# Altium PCB PCB_volume-adjuster.pcbdoc
Units mil, origin at the board's own origin, x right, y up, seen from the top; angles counter-clockwise.
Board outline 2755.91 x 1968.5 mil, 2 copper layers (Top Layer, Bottom Layer); 60 components, 49 nets, 243 pads, 0 vias.
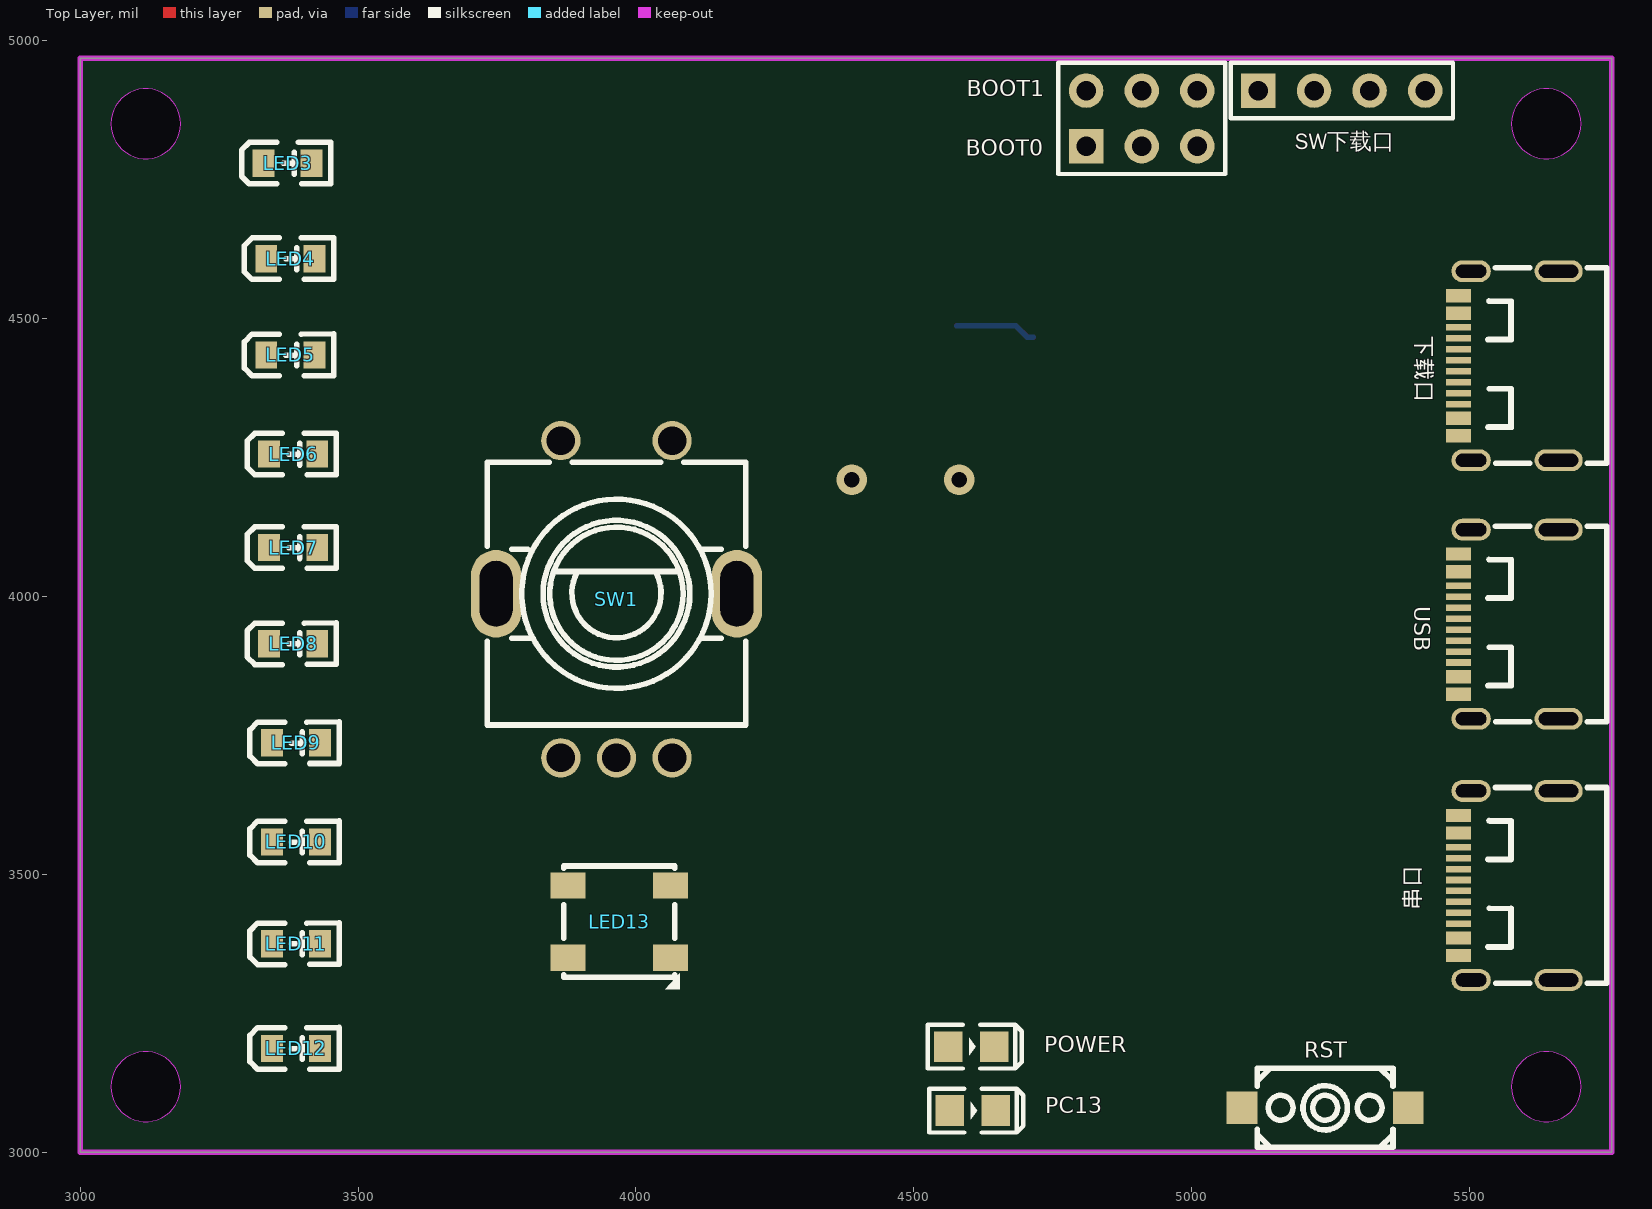
[diagram p0: Top Layer view]
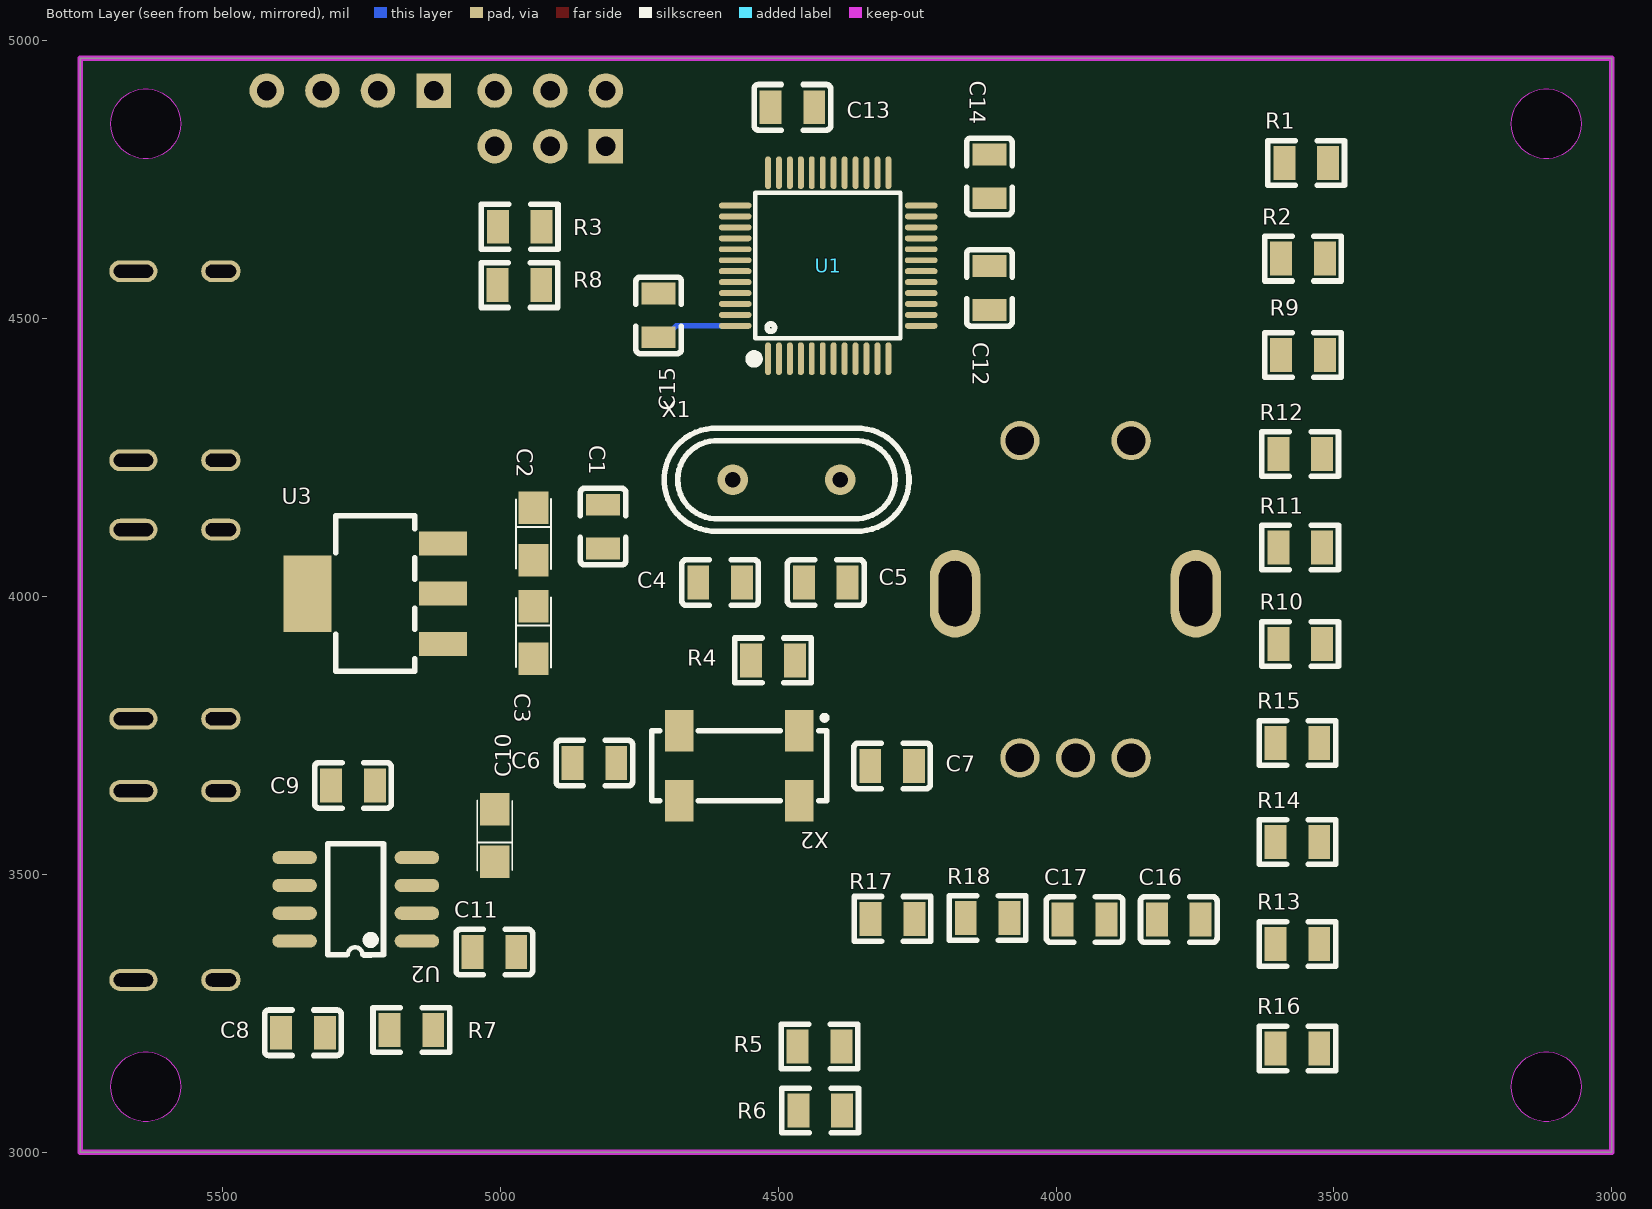
[diagram p1: Bottom Layer view, seen from below]

## Layer stack, top to bottom
Top Solder Mask Layer: solder mask 0.4, Solder Resist, Dk 3.5
Top Layer: signal copper 1.4
Dielectric1: dielectric 12.6, FR-4, Dk 4.8
Bottom Layer: signal copper 1.4
Bottom Solder Mask Layer: solder mask 0.4, Solder Resist, Dk 3.5

## Board outline
5755.91,3000 3000,3000 3000,4968.5 5755.91,4968.5
cut-out: 3181.1,4850.39 ccw(c3118.11,4850.39) 3055.12,4850.39 ccw(c3118.11,4850.39) 3181.1,4850.39
cut-out: 3181.1,3118.11 ccw(c3118.11,3118.11) 3055.12,3118.11 ccw(c3118.11,3118.11) 3181.1,3118.11
cut-out: 5700.79,3118.11 ccw(c5637.8,3118.11) 5574.8,3118.11 ccw(c5637.8,3118.11) 5700.79,3118.11
cut-out: 5700.79,4850.39 ccw(c5637.8,4850.39) 5574.8,4850.39 ccw(c5637.8,4850.39) 5700.79,4850.39

## Design rules (kind name [scope] priority, off if disabled: settings)
Clearance [All] p1: gap=10 ignorepadtopadclearanceinfootprint=TRUE except(0: Arc-Hole Track-Hole SMDPad-Hole THPad-Hole Via-Hole Fill-Hole Poly-Hole Region-Hole Text-Hole)
PolygonConnect [All] p1: connectstyle=Relief reliefconductorwidth=10 reliefentries=4 polygonreliefangle="90 Angle" airgapwidth=10
RoutingVias [All] p1: holewidth=28 width=50 viastyle="Through Hole" minholewidth=28 minwidth=50 maxholewidth=28 maxwidth=50
SolderMaskExpansion [All] p1: expansion=4 istentingtop=FALSE
Width [All] p1: maxlimit=10 minlimit=10 preferedwidth=10
30 further rules are at their usual default settings.

## Components (designator, comment, footprint, x,y, rotation, side; value= is the part's Value field where it differs from the comment)
BOOT1 "HDR-M-2.54_2x3" HDR-M-2.54_2X3 4810,4810 r0 top
C1 "0.1u" C0805 4815,4125.63 r270 bottom
C2 "10u" CASE-A_3216 4940,4112.24 r270 bottom
C3 "10u" CASE-A_3216 4940,3935 r270 bottom
C4 "22p" C0805 4604.37,4025 r180 bottom
C5 "22p" C0805 4414.37,4025 r180 bottom
C6 "22p" C0805 4830.63,3700 r180 bottom
C7 "22p" C0805 4295,3695 r180 bottom
C8 "0.1u" C0805 5355,3215 r180 bottom
C9 "0.1u" C0805 5265,3660 r0 bottom
C10 "10u" CASE-A_3216 5010,3570 r90 bottom
C11 "0.1u" C0805 5010.63,3360 r180 bottom
C12 "0.1u" C0805 4120,4555 r90 bottom
C13 "0.1u" C0805 4474.37,4880 r0 bottom
C14 "0.1u" C0805 4120,4755.63 r90 bottom
C15 "0.1u" C0805 4715,4505.63 r270 bottom
C16 "0.1u" C0805 3779.26,3418.61 r180 bottom
C17 "0.1u" C0805 3948.75,3418.61 r180 bottom
LED3 "NCD0805R1" LED0805-RD_RED 3373.27,4779.54 r0 top
LED4 "NCD0805R1" LED0805-RD_RED 3378.27,4607.63 r0 top
LED5 "NCD0805R1" LED0805-RD_RED 3378.27,4434.38 r0 top
LED6 "NCD0805R1" LED0805-RD_RED 3383.27,4256.14 r0 top
LED7 "NCD0805R1" LED0805-RD_RED 3383.27,4087.9 r0 top
LED8 "NCD0805R1" LED0805-RD_RED 3383.27,3914.66 r0 top
LED9 "NCD0805R1" LED0805-RD_RED 3388.27,3736.41 r0 top
LED10 "NCD0805R1" LED0805-RD_RED 3388.27,3558.17 r0 top
LED11 "NCD0805R1" LED0805-RD_RED 3388.27,3374.93 r0 top
LED12 "NCD0805R1" LED0805-RD_RED 3388.27,3186.68 r0 top
LED13 "WS2812C" LED-SMD_4P-L5.0-W5.0-LS5.4-TL-1 3970,3415 r0 top
PC13 "LED-0805_B" LED0805_BLUE 4606.35,3075 r0 top
POWER "LED-0805_B" LED0805_BLUE 4603.65,3190 r0 top
R1 "1.5K" R0805 3550,4780 r180 bottom
R2 "1.5K" R0805 3555.81,4607.63 r180 bottom
R3 "10k" R0805 4965,4665 r180 bottom
R4 "10M" R0805 4509.37,3885 r180 bottom
R5 "1k" R0805 4425.63,3190 r180 bottom
R6 "1k" R0805 4424.37,3075 r180 bottom
R7 "1k" R0805 5160,3220 r180 bottom
R8 "10k" R0805 4965.63,4560 r180 bottom
R9 "1.5K" R0805 3555.81,4434.38 r180 bottom
R10 "1.5K" R0805 3560.81,3914.66 r180 bottom
R11 "1.5K" R0805 3560.81,4087.9 r180 bottom
R12 "1.5K" R0805 3560.81,4256.14 r180 bottom
R13 "1.5K" R0805 3565.81,3374.93 r180 bottom
R14 "1.5K" R0805 3565.81,3558.17 r180 bottom
R15 "1.5K" R0805 3565.81,3736.41 r180 bottom
R16 "1.5K" R0805 3565.81,3186.68 r180 bottom
R17 "10k" R0805 4294.37,3420 r180 bottom
R18 "10k" R0805 4123.23,3421.4 r180 bottom
RST "K2-3.6×6.1_SMD" KEY-SMD_2P-L6.2-W3.6-LS8.0 5240,3080 r0 top
SW1 "EC11E153440D" SW-TH_EC11XXXXXXXX 3965,3995 r0 top
SW下载口 "HDR-M-2.54_1x4" HDR-M-2.54_1X4 5270,4910 r0 top
U1 "STM32F103C8T6" LQFP-48_L7.0-W7.0-P0.50-LS9.0-BL 4410,4595 r180 bottom
U2 "CH340N" LM393_SOP8 5260,3455 r0 bottom
U3 "AMS1117-3.3" SOT-223-3_L6.5-W3.4-P2.30-LS7.0-BR 5225,4005 r180 bottom
USB "USB-310F" USB-C-SMD_20P-P0.50-L6.5-W8.9 5570,3950 r180 top
X1 "S1C80000VWGAC" OSC-TH_L11.1-W4.7-P4.88 4485,4210 r180 bottom
X2 "32.768KHz" MC-306_4P-L8.0-W3.2-P5.5-BL 4570,3695 r0 bottom
下载口 "USB-310F" USB-C-SMD_20P-P0.50-L6.5-W8.9 5570,4415 r180 top
串口 "USB-310F" USB-C-SMD_20P-P0.50-L6.5-W8.9 5570,3480 r180 top

## Footprints (in the part's own frame and the unit in brackets; to place one, negate y for a bottom-side part, rotate by r counter-clockwise, add the part's x,y. Pads: shape width x height; smd on the part's side, far side on the other; paste and mask are expansions set on the pad)
C0805 [mm]
  rect 1x1.55 smd mask+0.102: 1(-1,0) 2(1,0)
  silkscreen extent -1.75,-1.04 1.75,1.04
CASE-A_3216 [mil]
  rect 59.05x53.5 smd mask+2: 1(-47.24,0) 2(47.24,0)
  silkscreen extent -63,-32 63,32
HDR-M-2.54_1X4 [mil]
  rect 62x62 hole 35 mask+2: 1(-150,0)
  round 62 hole 35 mask+2: 2(-50,0) 3(50,0) 4(150,0)
  silkscreen extent -200,-50 200,50
HDR-M-2.54_2X3 [mil]
  rect 62x62 hole 35 mask+2: 1(0,0)
  round 62 hole 35 mask+2: 2(0,100) 3(100,0) 4(100,100) 5(200,0) 6(200,100)
  silkscreen extent -50,-50 250,150
KEY-SMD_2P-L6.2-W3.6-LS8.0 [mm]
  rect 1.4x1.5 smd mask+0.051: 1(-3.8,0) 2(3.8,0)
  silkscreen extent -3.1,-1.8 3.1,1.8
LED0805-RD_RED [mm]
  rect 1x1.25 smd mask+0.051: 1(-1.1,0) 2(1.1,0)
  silkscreen extent -2.1,-0.95 1.98,0.96
LED0805_BLUE [mil]
  rect 51.2x55.1 smd mask+2: 1(-41.35,0) 2(41.35,0)
  silkscreen extent -79,-39 91,39
LED-SMD_4P-L5.0-W5.0-LS5.4-TL-1 [mm]
  rect 1.6x1.2 smd mask+0.05: 1(-2.35,1.65) 2(-2.35,-1.65) 3(2.35,-1.65) 4(2.35,1.65)
  silkscreen extent -2.54,-3.09 2.77,2.54
LM393_SOP8 [mil]
  oval 80x23.62 smd mask+4: 1(-110,75) 2(-110,25) 3(-110,-25) 4(-110,-75) 5(110,-75) 6(110,-25) 7(110,25) 8(110,75)
  silkscreen extent -50,-100 50,100
LQFP-48_L7.0-W7.0-P0.50-LS9.0-BL [mm]
  oval 0.27x1.5 smd mask+0.05: 1(-2.75,-4.25) 2(-2.25,-4.25) 3(-1.75,-4.25) 4(-1.25,-4.25) 5(-0.75,-4.25) 6(-0.25,-4.25) 7(0.25,-4.25) 8(0.75,-4.25) 9(1.25,-4.25) 10(1.75,-4.25) 11(2.25,-4.25) 12(2.75,-4.25) 25(2.75,4.25) 26(2.25,4.25) 27(1.75,4.25) 28(1.25,4.25) 29(0.75,4.25) 30(0.25,4.25) 31(-0.25,4.25) 32(-0.75,4.25) 33(-1.25,4.25) 34(-1.75,4.25) 35(-2.25,4.25) 36(-2.75,4.25)
  oval 1.5x0.27 smd mask+0.05: 13(4.25,-2.75) 14(4.25,-2.25) 15(4.25,-1.75) 16(4.25,-1.25) 17(4.25,-0.75) 18(4.25,-0.25) 19(4.25,0.25) 20(4.25,0.75) 21(4.25,1.25) 22(4.25,1.75) 23(4.25,2.25) 24(4.25,2.75) 37(-4.25,2.75) 38(-4.25,2.25) 39(-4.25,1.75) 40(-4.25,1.25) 41(-4.25,0.75) 42(-4.25,0.25) 43(-4.25,-0.25) 44(-4.25,-0.75) 45(-4.25,-1.25) 46(-4.25,-1.75) 47(-4.25,-2.25) 48(-4.25,-2.75)
  silkscreen extent -3.59,-4.46 3.3,3.34
MC-306_4P-L8.0-W3.2-P5.5-BL [mil]
  rect 51.2x74.8 smd mask+4: 1(-108.27,-63) 2(108.27,-63) 3(108.27,63) 4(-108.27,63)
  silkscreen extent -157,-91 157,63
OSC-TH_L11.1-W4.7-P4.88 [mm]
  round 1.4 hole 0.7 mask+0.051: 1(-2.45,0) 2(2.45,0)
  silkscreen extent -5.59,-2.35 5.6,2.35
R0805 [mm]
  rect 1x1.55 smd mask+0.102: 1(-1,0) 2(1,0)
  silkscreen extent -1.75,-1.02 1.75,1.02
SOT-223-3_L6.5-W3.4-P2.30-LS7.0-BR [mm]
  rect 2.2x1.1 smd mask+0.102: 1(3.099,-2.3) 2(3.099,0) 3(3.099,2.3)
  rect 2.2x3.5 smd mask+0.102: 4(-3.099,0)
  silkscreen extent -1.8,-3.55 1.8,3.55
SW-TH_EC11XXXXXXXX [mm]
  oval 2.3x4 hole 1.5 slot 3 at 90 deg mask+0.051: 6(5.5,0.25) 7(-5.5,0.25)
  round 1.8 hole 1.3 mask+0.051: A(-2.54,-7.25) B(2.54,-7.25) C(0,-7.25) D(-2.54,7.25) E(2.54,7.25)
  silkscreen extent -5.9,-5.75 5.9,6.25
USB-C-SMD_20P-P0.50-L6.5-W8.9 [mm]
  oval 2.2x1 hole 0.6 slot 1.8 at 0 deg mask+0.05: 0(-2.287,4.32) 1(-2.287,-4.32)
  oval 1.8x1 hole 0.6 slot 1.4 at 0 deg mask+0.05: 2(1.712,-4.32) 3(1.712,4.32)
  rect 1.15x0.3 smd mask+0.05: A1(2.288,3.35) A4(2.288,2.55) A5(2.288,1.25) A6(2.288,0.25) A7(2.288,-0.25) A8(2.288,-1.25) A9(2.288,-2.55) A12(2.288,-3.35) B1(2.288,-3.05) B4(2.288,-2.25) B5(2.288,-1.75) B6(2.288,-0.75) B7(2.288,0.75) B8(2.288,1.75) B9(2.288,2.25) B12(2.288,3.05)
  silkscreen extent -4.49,-4.48 1.06,4.46

## Nets (pads, with @x,y where several pads share a name; then routed paths per layer and width w, separated by ;. In a path a pad name is that pad's centre, name@x,y a point inside that pad or via, vN(x,y) a via of type N, cw(c..) or ccw(c..) an arc to the next point about the centre after c; other vN are vias at no path point)
3V3: BOOT1.1 BOOT1.2 C3.1 C12.2 C13.2 C14.2 C15.2 C16.1 C17.1 R5.1 R6.1 R7.2 SW1.C SW1.D SW下载口.1 U1.1 U1.9 U1.24 U1.36 U1.48 U3.2 U3.4 | length 146.2
  Bottom Layer w10: U1.48 4683.7,4486.73 4704.17,4466.26 C15.2
$1N704: POWER.1 R5.2
$1N709: PC13.1 R6.2
$1N730: BOOT1.4 R8.1
$1N731: BOOT1.3 R3.2
$2N1928: LED11.1 R13.1
$2N1929: LED12.1 R16.1
$2N1930: LED9.1 R15.1
$2N1931: LED10.1 R14.1
$2N1932: LED7.1 R11.1
$2N1933: LED8.1 R10.1
$2N1934: LED5.1 R9.1
$2N1935: LED6.1 R12.1
$2N1936: LED4.1 R2.1
$2N1937: LED3.1 R1.1
+5V: C1.1 C2.1 C9.2 C10.1 LED3.2 LED4.2 LED5.2 LED6.2 LED7.2 LED8.2 LED9.2 LED10.2 LED11.2 LED12.2 LED13.1 U2.5 U3.3 USB.A4 USB.A9 USB.B4 USB.B9 下载口.A4 下载口.A9 下载口.B4 下载口.B9 串口.A4 串口.A9 串口.B4 串口.B9
BOOT0: R3.1 U1.44
BOOT1: R8.2 U1.20
D+: U2.1 串口.A6 串口.B6
D-: U2.2 串口.A7 串口.B7
EC11_A: C16.2 R18.1 SW1.A U1.25
EC11_B: C17.2 R17.2 SW1.B U1.26
EC11_SW: SW1.E U1.27
GND: BOOT1.5 BOOT1.6 C1.2 C2.2 C3.2 C4.1 C5.1 C6.1 C7.1 C8.2 C9.1 C10.2 C11.1 C12.1 C13.1 C14.1 C15.1 LED13.3 POWER.2 R17.1 R18.2 RST.1 SW下载口.2 U1.8 U1.23 U1.35 U1.47 U2.3 U3.1 USB.A1 USB.A12 USB.B1 USB.B12 下载口.A1 下载口.A12 下载口.B1 下载口.B12 串口.A1 串口.A12 串口.B1 串口.B12
LED: PC13.2 U1.2
LED_RGB: LED13.4 U1.28
OCS32_IN: C6.2 U1.3 X2.4
OCS32_OUT: C7.2 U1.4 X2.1
OCS_IN: C4.2 R4.1 U1.5 X1.1
OCS_OUT: C5.2 R4.2 U1.6 X1.2
PWM1: R1.2 U1.10
PWM2: R2.2 U1.11
PWM3: R9.2 U1.13
PWM4: R12.2 U1.16
PWM5: R11.2 U1.17
PWM6: R10.2 U1.19
PWM7: R15.2 U1.29
PWM8: R14.2 U1.42
PWM9: R13.2 U1.43
PWM10: R16.2 U1.46
RESET: C8.1 R7.1 RST.2 U1.7
SWCLK: SW下载口.4 U1.37 下载口.A7 下载口.B7
SWDIO: 下载口.A6 下载口.B6
SWIO: SW下载口.3 U1.34
USART1_RX: U1.31 U2.6
USART1_TX: U1.30 U2.7
USBDM: U1.32 USB.A7 USB.B7
USBDP: U1.33 USB.A6 USB.B6
V3: C11.2 U2.8
pads on no net: LED13.2 SW1.6 SW1.7 U1.12 U1.14 U1.15 U1.18 U1.21 U1.22 U1.38 U1.39 U1.40 U1.41 U1.45 U2.4 USB.0 USB.1 USB.2 USB.3 USB.A5 USB.A8 USB.B5 USB.B8 X2.2 X2.3 下载口.0 下载口.1 下载口.2 下载口.3 下载口.A5 下载口.A8 下载口.B5 下载口.B8 串口.0 串口.1 串口.2 串口.3 串口.A5 串口.A8 串口.B5 串口.B8

## Keep-outs
Board Outline Layer:
  the board outline again, w10

## Silkscreen, mask and mechanical layers (free items; w line width, h text height)
Top Silkscreen Layer:
  text "BOOT0" at 4593.64,4792.49 h29.2
Mechanical Layer:
  circle w1: c3118.11,4850.39 r62.99
  circle w1: c3118.11,3118.11 r62.99
  circle w1: c5637.8,3118.11 r62.99
  circle w1: c5637.8,4850.39 r62.99